# Altium PCB PCB1.PcbDoc
Units mil, origin at the board's own origin, x right, y up, seen from the top; angles counter-clockwise.
Board outline 5229.53 x 2497.54 mil, 2 copper layers (Top Layer, Bottom Layer); 38 components, 19 nets, 93 pads, 4 vias.
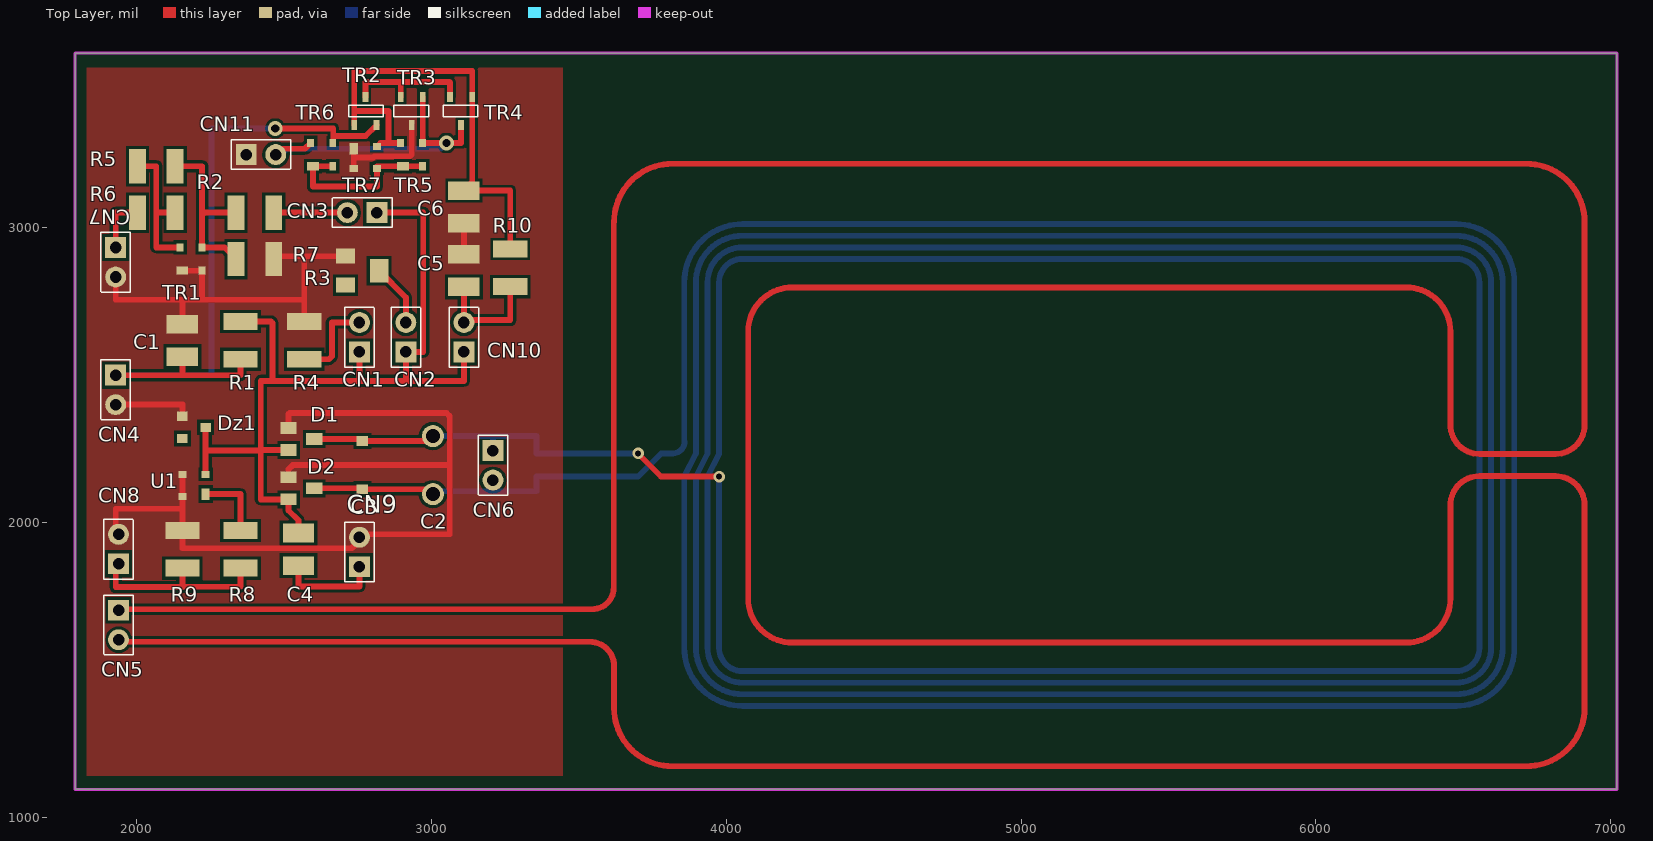
[diagram p0: Top Layer view]
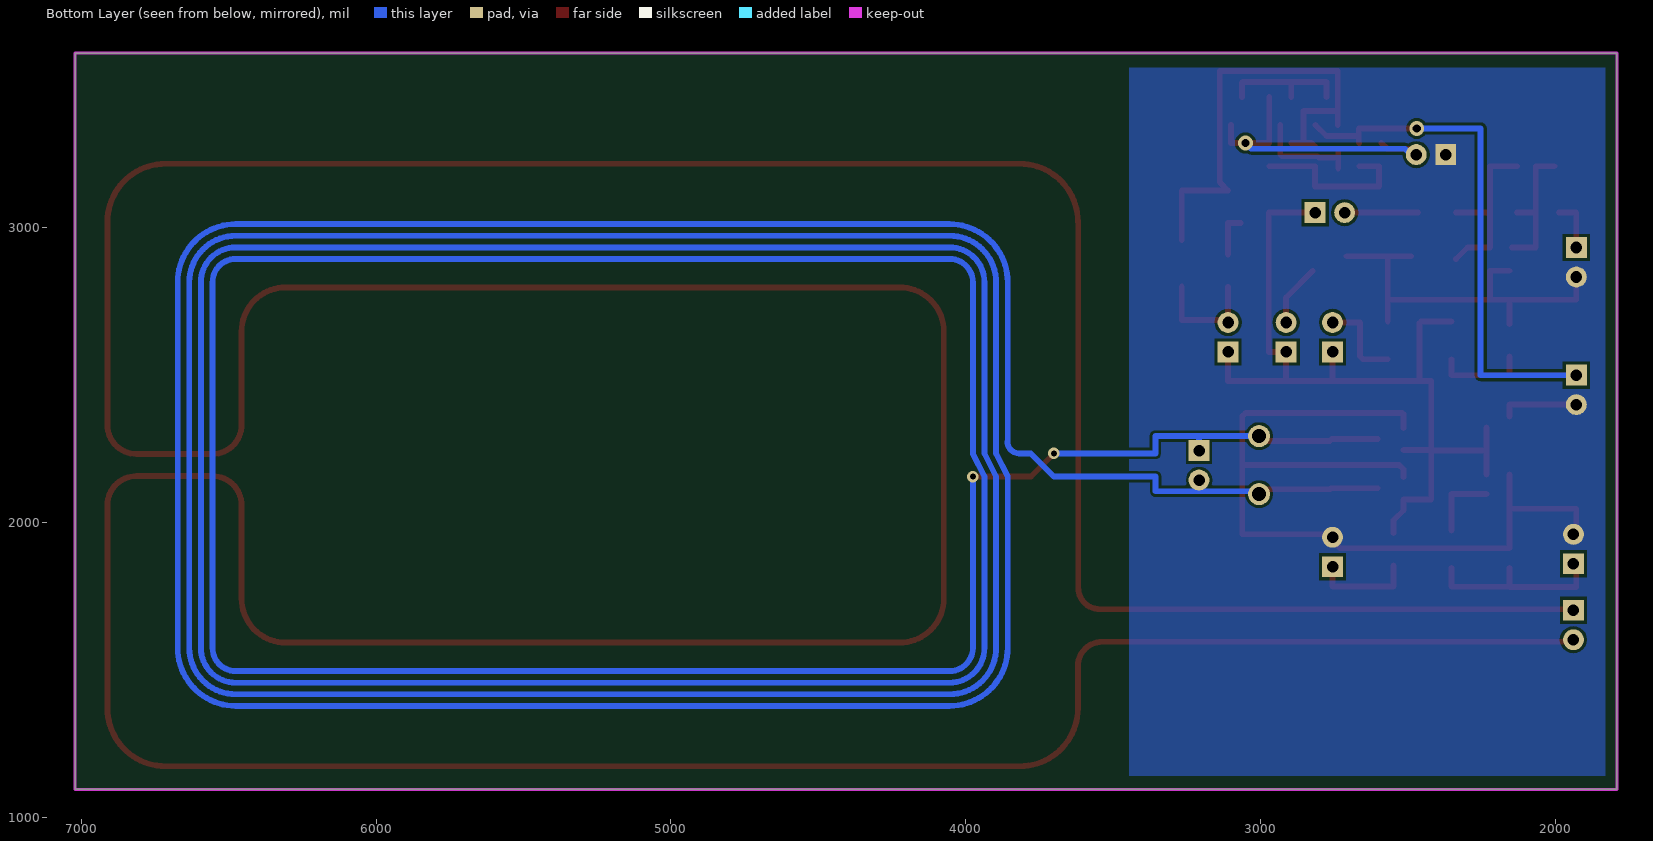
[diagram p1: Bottom Layer view, seen from below]
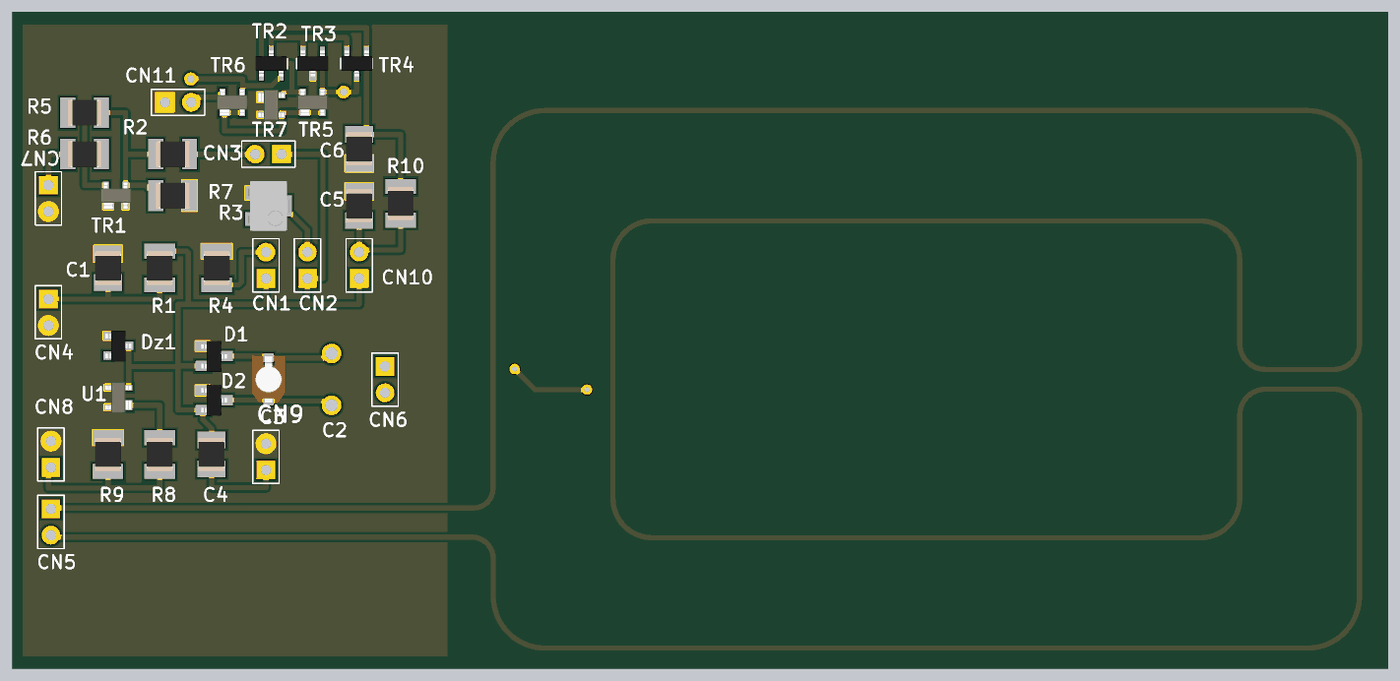
[diagram p2: 3D render of the assembled board from above, using the file's embedded part models]

## Layer stack, top to bottom
Top Solder: solder mask 0.4, Solder Resist, Dk 3.5
Top Layer: signal copper 1.4
Dielectric 1: dielectric 12.6, FR-4, Dk 4.8
Bottom Layer: signal copper 1.4
Bottom Solder: solder mask 0.4, Solder Resist, Dk 3.5

## Board outline
1791.34,1094.98 1791.34,3592.52 7020.87,3592.52 7020.87,1094.98

## Design rules (kind name [scope] priority, off if disabled: settings)
Clearance [All] p1: gap=10
PlaneClearance [All] p1: clearance=39.37
PolygonConnect PolygonConnect_1 [InNet('GND')] p1: connectstyle=Direct reliefconductorwidth=10 reliefentries=4 polygonreliefangle="90 Angle" airgapwidth=10
PolygonConnect [All] p2: connectstyle=Relief reliefconductorwidth=10 reliefentries=4 polygonreliefangle="90 Angle" airgapwidth=10
RoutingVias [All] p1: holewidth=28 width=50 viastyle="Through Hole" minholewidth=28 minwidth=50 maxholewidth=28 maxwidth=50
SolderMaskExpansion [All] p1: expansion=4
UnpouredPolygon [All] p1: allowunpoured=FALSE
Width [All] p1: maxlimit=39.37 minlimit=10 preferedwidth=19.68 minimp=50.000000 maximp=50.000000 favimp=50.000000
28 further rules are at their usual default settings.

## Classes and differential pairs
component class Picc: C1 C2 C3 C4 CN1 CN2 CN3 CN4 CN5 CN6 CN7 CN8 CN9 D1 D2 Dz1 R1 R2 R3 R4 R5 R6 R7 R8 R9 TR1 U1
component class DemDis: C5 C6 CN10 CN11 CN12 CN14 CN15 CN16 R10 TR2 TR3 TR4 TR5 TR6 TR7

## Components (designator, comment, footprint, x,y, rotation, side; value= is the part's Value field where it differs from the comment)
C1 "1nF" C_1210 2155.51,2618.11 r90 top
C2 "GKGXXX15" GKGXXX15 3005.12,2194.88 r90 top
C3 "TZC3" TZC3 2765.75,2194.88 r90 top
C4 "27pF" C_1210 2549.21,1909.45 r270 top
C5 "Cap" C_1210 3110.24,2854.33 r270 top
C6 "Cap" C_1210 3110.24,3070.87 r90 top
CN1 "C_2" "2x1 Pin Array" 2755.91,2578.74 r90 top
CN2 "C_2" "2x1 Pin Array" 2913.39,2578.74 r90 top
CN3 "C_2" "2x1 Pin Array" 2814.96,3051.18 r180 top
CN4 "C_2" "2x1 Pin Array" 1929.13,2500 r270 top
CN5 "C_2" "2x1 Pin Array" 1938.98,1702.76 r270 top net-tie
CN6 "C_2" "2x1 Pin Array" 3208.66,2244.09 r270 top net-tie
CN7 "C_2" "2x1 Pin Array" 1929.13,2933.07 r270 top
CN8 "C_2" "2x1 Pin Array" 1938.98,1860.24 r90 top
CN9 "C_2" "2x1 Pin Array" 2755.91,1850.39 r90 top
CN10 "Jump_1" "2x1 Pin Array" 3110.24,2578.74 r90 top
CN11 "C_2" "2x1 Pin Array" 2372.05,3248.03 r0 top
D1 "BAR43S" BAR43S 2559.06,2283.46 r270 top
D2 "BAR43S" BAR43S 2559.06,2116.14 r270 top
Dz1 "BZX84-15V" BZX84 2194.88,2322.83 r270 top
R1 "51k" R_1210 2352.36,2618.11 r270 top
R2 "51" R_1210 2401.57,3051.18 r180 top
R3 "0K - 2K" "BOURNS 3224W" 2765.75,2854.33 r180 top
R4 "1K8" R_1210 2568.9,2618.11 r270 top
R5 "500K" R_1210 2066.93,3208.66 r180 top
R6 "110K" R_1210 2066.93,3051.18 r180 top
R7 "1K5" R_1210 2401.57,2893.7 r180 top
R8 "220" R_1210 2352.36,1909.45 r270 top
R9 "51" R_1210 2155.51,1909.45 r90 top
R10 "R_1/4" R_1210 3267.72,2864.17 r270 top
TR1 "BSS83" BSS83 2185.04,2893.7 r0 top
TR2 "BSS84" SOT_23 2776.04,3395.67 r0 top
TR3 "BSS84" SOT_23 2933.52,3395.67 r180 top
TR4 "BSS84" SOT_23 3100.85,3395.67 r180 top
TR5 "BSS83" BSS83 2933.07,3248.03 r0 top
TR6 "BSS83" BSS83 2627.95,3248.03 r0 top
TR7 "BSS83" BSS83 2776.04,3238.19 r270 top
U1 "BCV61A" BCV61A 2194.88,2125.98 r90 top

## Footprints (in the part's own frame and the unit in brackets; to place one, negate y for a bottom-side part, rotate by r counter-clockwise, add the part's x,y. Pads: shape width x height; smd on the part's side, far side on the other; paste and mask are expansions set on the pad)
"2x1 Pin Array" [mm]
  rect 1.8x1.8 hole 1: 1(0,0)
  round 1.8 hole 1: 2(2.54,0)
  silkscreen extent -1.31,-1.27 3.84,1.27
BAR43S [mm]
  rect 1x1.4 smd: 1(-0.95,-1.1) 2(0.95,-1.1) 3(0,1.1)
  body extent -1.48,-1.25 1.52,1.25, height 1.05
BCV61A [mm]
  rect 1x0.7 smd: 1(-0.75,-1)
  rect 0.6x0.7 smd: 2(0.95,-1) 3(0.95,1) 4(-0.95,1)
  body extent -1.5,-1.25 1.5,1.25, height 1.1
"BOURNS 3224W" [mm]
  rect 1.6x1.3 smd: 1(1.45,-1.25) 2(1.45,1.25)
  rect 1.6x2 smd: 3(-1.45,0)
  body extent -1.97,-2.41 1.97,2.41, height 5.29
BSS83 [mm]
  rect 1x0.7 smd: 1(-0.75,-1)
  rect 0.6x0.7 smd: 2(0.95,-1) 3(0.95,1) 4(-0.95,1)
  body extent -1.5,-1.25 1.5,1.25, height 1.1
BZX84 [mm]
  rect 0.8x0.9 smd: 1(-0.95,-1) 2(0.95,-1) 3(0,1)
  body extent -1.48,-1.25 1.52,1.25, height 1.05
C_1210 [mm]
  rect 1.6x2.7 smd: 1(1.4,0) 2(-1.4,0)
  body extent -1.6,-1.25 1.6,1.26, height 0.53
GKGXXX15 [mm]
  round 1.9 hole 1.2: 0(2.5,0) 1(-2.5,0)
R_1210 [mm]
  rect 1.45x2.95 smd: 1(1.625,0) 2(-1.625,0)
  body extent -1.6,-1.25 1.6,1.26, height 0.53
SOT_23 [mm] "SOT 23"
  rect 0.5x0.85 smd: 1(-0.95,-1.212) 2(0.95,-1.212) 3(0,1.213)
  silkscreen extent -1.45,-0.5 1.55,0.5, body extent -1.5,-1.25 1.5,1.25, height 1.05
TZC3 [mm]
  rect 0.85x1 smd: 0(2.075,0) 1(-2.075,0)
  body extent -2.25,-1.6 2.35,1.6, height 1.6

## Part data
C1 C4: library part Cap, "Ceramic Capacitor"
C2: "10"
C5 C6: "Ceramic Capacitor"
CN1 CN2 CN3 CN4 CN5 CN6 CN7 CN8 CN9 CN10 CN11: "Conector 2 pines"
Dz1: library part BZX84
R1 R2 R4 R5 R6 R7 R8 R9: library part R, "Chip Resistor"
R3: library part Rvar, "SMD Potentiometer"
R10: "Chip Resistor"

## Via types
v1: diameter 39.37, hole 19.68, Top Layer to Bottom Layer, 2 vias
v2: diameter 50, hole 28, Top Layer to Bottom Layer, 2 vias

## Nets (pads, with @x,y where several pads share a name; then routed paths per layer and width w, separated by ;. In a path a pad name is that pad's centre, name@x,y a point inside that pad or via, vN(x,y) a via of type N, cw(c..) or ccw(c..) an arc to the next point about the centre after c; other vN are vias at no path point)
COIL: C2.0 C2.1 C3.0 C3.1 CN6.1 CN6.2 D1.3 D2.3 | length 35580.8
  Top Layer w19.68: D2.3 2762.8,2116.14 C3.1 2988.39,2113.19 C2.1 ; D1.3 2758.86,2283.46 C3.0 2988.39,2276.57 C2.0 ; v1(3700.87,2234.61) 3778.98,2155.87 v1(3975.87,2155.87)
  Bottom Layer w19.68: C2.1@3005.12,2106.3 3208.66,2106.3 ; C2.0 3356.3,2293.31 3356.65,2292.95 3356.65,2234.61 v1(3700.87,2234.61) ; CN6.2 3208.66,2106.3 ; CN6.1 3208.66,2283.46 ; 3857.76,2273.98 3857.76,2815.31 cw(c4054.61,2815.31) 4054.61,3012.17 6475.87,3012.17 cw(c6475.87,2815.32) 6672.72,2815.32 6672.72,1575.16 cw(c6475.87,1575.16) 6475.87,1378.31 4054.61,1378.31 cw(c4054.61,1575.16) 3857.76,1575.16 3857.76,2155.87 3897.13,2234.61 3897.13,2815.32 cw(c4054.61,2815.32) 4054.61,2972.8 6475.87,2972.8 cw(c6475.87,2815.32) 6633.35,2815.32 6633.35,1575.16 cw(c6475.87,1575.16) 6475.87,1417.68 4054.61,1417.68 cw(c4054.61,1575.16) 3897.13,1575.16 ; 3858.35,2273.98 cw(c3818.98,2273.98) 3818.98,2234.61 3779.61,2234.61 3700.87,2155.87 3356.3,2155.87 3356.3,2106.3 3208.66,2106.3 ; 3897.13,1573.39 3897.13,2155.87 3936.5,2234.61 3936.5,2815.32 cw(c4054.61,2815.32) 4054.61,2933.43 6475.87,2933.43 cw(c6475.87,2815.32) 6593.98,2815.32 6593.98,1575.16 cw(c6475.87,1575.16) 6475.87,1457.05 4054.61,1457.05 cw(c4054.61,1575.16) 3936.5,1575.16 3936.5,2155.87 3975.87,2234.61 3975.87,2815.32 cw(c4054.61,2815.32) 4054.61,2894.06 6475.87,2894.06 cw(c6475.87,2815.32) 6554.61,2815.32 6554.61,1575.16 cw(c6475.87,1575.16) 6475.87,1496.42 4054.61,1496.42 cw(c4054.61,1575.16) 3975.87,1575.16 v1@3975.87,2150.04
GND: C1.1 C5.2 C6.2 CN4.2 CN7.2 CN8.2 CN9.2 CN11.1 D1.1 D2.1 Dz1.1 R3.1 R4.2 R7.2 R9.1 TR1.1 TR1.2 TR3.3 TR7.1 TR7.2 U1.3 U1.4 | length 5246.5
  Top Layer w19.68: CN8.2@1929.13,1950.39 1929.13,2047.24 2155.51,2047.24 ; CN4.2 2155.51,2400 Dz1.1 ; CN7.2@1929.13,2813.39 1929.13,2755.91 2155.51,2755.91 ; U1.3 2155.51,2047.24 ; C1.1 2155.51,2755.91 ; TR1.1 TR1.2 2222.44,2757.87 ; R7.2@2490.16,2903.54 R3.1 ; D2.1 2515.75,2181.1 2529.53,2194.88 3062.36,2194.88 ; D1.1 2515.75,2368.11 2519.68,2372.05 3051.18,2372.05 3062.36,2360.87 3062.36,2194.88 ; R4.2 2568.9,2755.91 ; 2568.9,2903.54 2568.9,2755.91 ; TR7.2 2736.67,3238.19 ; TR7.1 2736.67,3238.19 ; TR3.3 2933.52,3248.48 2927.32,3242.28 2807.06,3242.28 2802.96,3238.19 2736.67,3238.19 ; C6.2@3067.24,3015.75 C6.2 C5.2 ; 2155.51,2047.24 R9.1 2155.51,1913.23 2730.16,1913.23 2777.17,1960.24 3062.36,1960.24 3062.36,2194.88 ; 2155.51,2755.91 2568.9,2755.91
MOD: CN8.1 R8.1 R9.2 | length 698.7
  Top Layer w19.68: CN8.1@1929.13,1866.14 1929.13,1781.5 2155.51,1781.5 R9.2 2155.51,1783.46 2154.53,1782.48 2351.38,1782.48 2352.36,1783.46 R8.1
NetC5_1: C5.1 CN10.2 R10.1 | length 399.4
  Top Layer w19.68: C5.1 CN10.2 3110.24,2687.01 3267.72,2687.01 R10.1
NetC6_1: C6.1 R10.2 TR2.1 TR4.1 TR5.4 TR7.4 | length 1683.4
  Top Layer w19.68: TR7.4 2827.23,3287.4 TR5.4@2896.12,3287.4 ; 2854.33,3287.4 2854.33,3395.67 2738.64,3395.67 TR2.1 2738.64,3531.5 3138.25,3531.5 TR4.1 3138.25,3154 C6.1 3267.72,3125.98 3267.72,2957.68
NetCN1_2: CN1.2 R4.1 | length 305.8
  Top Layer w19.68: R4.1 2652.56,2554.13 2662.45,2564.03 2662.45,2678.74 CN1.2
NetCN2_2: CN2.2 R3.3 | length 213.1
  Top Layer w19.68: R3.3 2913.39,2763.78 CN2.2
NetCN3_2: CN3.2 R2.2 | length 251
  Top Layer w19.68: R2.2 CN3.2@2716.54,3051.18
NetR2_1: R2.1 R5.2 R7.1 TR1.3 | length 616.7
  Top Layer w19.68: R5.2 2222.44,3208.66 2222.44,3043.95 ; R7.1 2298.23,2933.07 TR1.3 2222.44,3043.95 ; R2.1 2229.67,3051.18 2222.44,3043.95
NetR5_1: R5.1 R6.2 TR1.4 | length 484.3
  Top Layer w19.68: R5.1 2066.93,3208.66 2066.93,2933.07 TR1.4 ; 2066.93,3051.18 R6.2
NetR8_2: R8.2 U1.1 | length 241.1
  Top Layer w19.68: U1.1 2352.36,2096.46 R8.2
NetTR2_3: TR2.3 TR3.2 TR4.2 | length 435.5
  Top Layer w19.68: TR2.3 2776.04,3494.09 2896.12,3494.09 ; TR3.2 2896.12,3494.09 ; 3061.48,3494.09 2896.12,3494.09 ; TR4.2 3063.45,3492.13
NetTR5_1: TR5.1 TR5.2 TR6.1 TR6.2 TR7.3 | length 577
  Top Layer w19.68: TR6.2 TR6.1 2598.43,3139.76 2814.96,3139.76 2815.41,3140.22 2815.41,3208.66 TR5.2@2970.93,3208.66
"SENSE COIL": CN5.1 CN5.2 | length 21036.1
  Top Layer w19.68: CN5.2@1938.98,1595.62 3537.21,1595.62 cw(c3537.21,1513.27) 3619.57,1513.27 3619.57,1370.43 ccw(c3816.42,1370.43) 3816.42,1173.58 6714.06,1173.58 ccw(c6714.06,1370.43) 6910.91,1370.43 6910.91,2059.41 ccw(c6812.48,2059.41) 6812.48,2157.83 6554.61,2157.83 ccw(c6554.61,2059.41) 6456.18,2059.41 6456.18,1742.48 cw(c6306.57,1742.48) 6306.57,1592.87 4223.9,1592.87 cw(c4223.9,1742.48) 4074.29,1742.48 4074.29,2647.99 cw(c4223.9,2647.99) 4223.9,2797.6 6306.57,2797.6 cw(c6306.57,2647.99) 6456.18,2647.99 6456.18,2331.06 ccw(c6554.61,2331.06) 6554.61,2232.64 6812.48,2232.64 ccw(c6812.48,2331.06) 6910.91,2331.06 6910.91,3020.04 ccw(c6714.06,3020.04) 6714.06,3216.89 3816.42,3216.89 ccw(c3816.42,3020.04) 3619.57,3020.04 ; CN5.2 CN5.2@1946.11,1595.62 ; CN5.1 CN5.1@1942.38,1706.16 ; CN5.1@1938.98,1706.16 3544.71,1706.16 ccw(c3544.71,1780.03) 3618.58,1780.03 3618.58,3020.04
V_DC: C1.2 CN4.1 R1.1 TR2.2 TR6.3 | length 2326.5
  Top Layer w19.68: CN4.1 2155.51,2500 ; C1.2 2155.51,2500 ; R1.1 2352.36,2500 2155.51,2500 ; v2(2470.47,3336.61) 2667.32,3336.61 2667.32,3311.36 ; TR6.3 2667.32,3289.37 2667.32,3311.36 ; TR2.2 2776.87,3311.36 2667.32,3311.36
  Bottom Layer w19.68: CN4.1 2253.94,2500 2253.94,3336.61 v2(2470.47,3336.61)
VC4: C4.1 CN9.1 | length 344.5
  Top Layer w19.68: C4.1 2549.21,1783.46 2755.91,1783.46 CN9.1
VOUT: CN11.2 TR3.1 TR4.3 TR5.3 TR6.4 | length 1079.9
  Top Layer w19.68: CN11.2@2470.47,3267.72 2570.87,3267.72 TR6.4 ; TR3.1 2970.93,3287.4 3100.85,3287.4 TR4.3
  Bottom Layer w19.68: CN11.2@2470.47,3228.35 2509.84,3267.72 3031.5,3267.72 v2(3051.18,3287.4)
VRECT: C4.2 CN1.1 CN2.1 CN3.1 CN10.1 D1.2 D2.2 Dz1.3 R1.2 U1.2 | length 3067.1
  Top Layer w19.68: U1.2 2234.25,2253.94 Dz1.3 ; 2234.25,2244.09 2421.26,2244.09 ; R1.2 2455.71,2682.09 2460.63,2677.17 2460.63,2480.32 ; 2419.29,2246.06 D1.2 ; C4.2 2549.21,2007.87 2515.75,2041.34 D2.2 2421.26,2078.74 2421.26,2480.32 2460.63,2480.32 ; CN1.1 2755.91,2480.32 ; CN3.1@2795.28,3051.18 2972.44,3051.18 2972.44,2578.74 CN2.1 2913.39,2480.32 ; CN10.1 3110.24,2480.32 2913.39,2480.32 ; 2460.63,2480.32 2755.91,2480.32 ; 2755.91,2480.32 2913.39,2480.32
VREF: CN7.1 R6.1 | length 196.9
  Top Layer w19.68: CN7.1@1929.13,2913.39 1929.13,3051.18 R6.1@1988.19,3051.18
pads on no net: Dz1.2 R3.2

## Polygon pours and split planes (outlines as drawn)
GND on Bottom Layer "Bottom Layer-No Net" (solid, pour order 6): 1830.71,3543.31 3444.88,3543.31 3444.88,1141.73 1830.71,1141.73
GND on Top Layer "Bottom Layer-No Net" (solid, pour order 8): 1830.71,3543.31 3444.88,3543.31 3444.88,1141.73 1830.71,1141.73 1830.71,3543.31

## Keep-outs
Keep-Out Layer:
  the board outline again, w10

## Silkscreen, mask and mechanical layers (free items; w line width, h text height)
Mechanical 1:
  lines w3.94: 3956.18,2076.93 3956.18,2346.93
  lines w10: 3444.88,1003.94 3444.88,3444.88 ; 3700.87,2234.61 3700.87,2155.87 3740.24,2195.24 3779.61,2234.61 ; 3779.61,2195.24 3818.98,2234.61 ; 3857.76,2216.93 3857.76,2295.67 3857.76,2335.04 ; 3877.44,2197.24 3916.81,2197.24 3956.18,2197.24 ; 3975.87,1866.93 3975.87,2536.93 ; 3975.87,2155.87 3619.57,2155.87 3619.57,2195.24 3619.57,2234.61 3975.87,2234.61 ; 4948.98,2894.06 5503.98,2894.06 ; 4993.98,1496.42 5653.98,1496.42 ; 6554.61,1786.93 6554.61,2621.93 ; 3706.18,3258.23 ccw(c3706.18,3132.24) 3580.2,3132.24 3580.2,3041.69 3580.2,1348.78 3580.2,1258.23 ccw(c3706.18,1258.23) 3706.18,1132.24 6824.29,1132.24 ccw(c6824.29,1258.23) 6950.28,1258.23 6950.28,3132.24 ccw(c6824.29,3132.24) 6824.29,3258.23 ; 3706.18,3258.23 6824.29,3258.23 ; 3706.18,3258.23 6824.29,3258.23 ; 3975.87,2234.61 3936.5,2234.61 3936.5,2195.24 3936.5,2155.87 3975.87,2234.61